# Altium PCB board.PcbDoc (part 1 of 2)
Units mm, origin at the board's own origin, x right, y up, seen from the top; angles counter-clockwise.
Board outline 58 x 79 mm, 2 copper layers (Top Layer, Bottom Layer), stack 0.97 mm thick; 224 components, 193 nets, 673 pads, 83 vias.
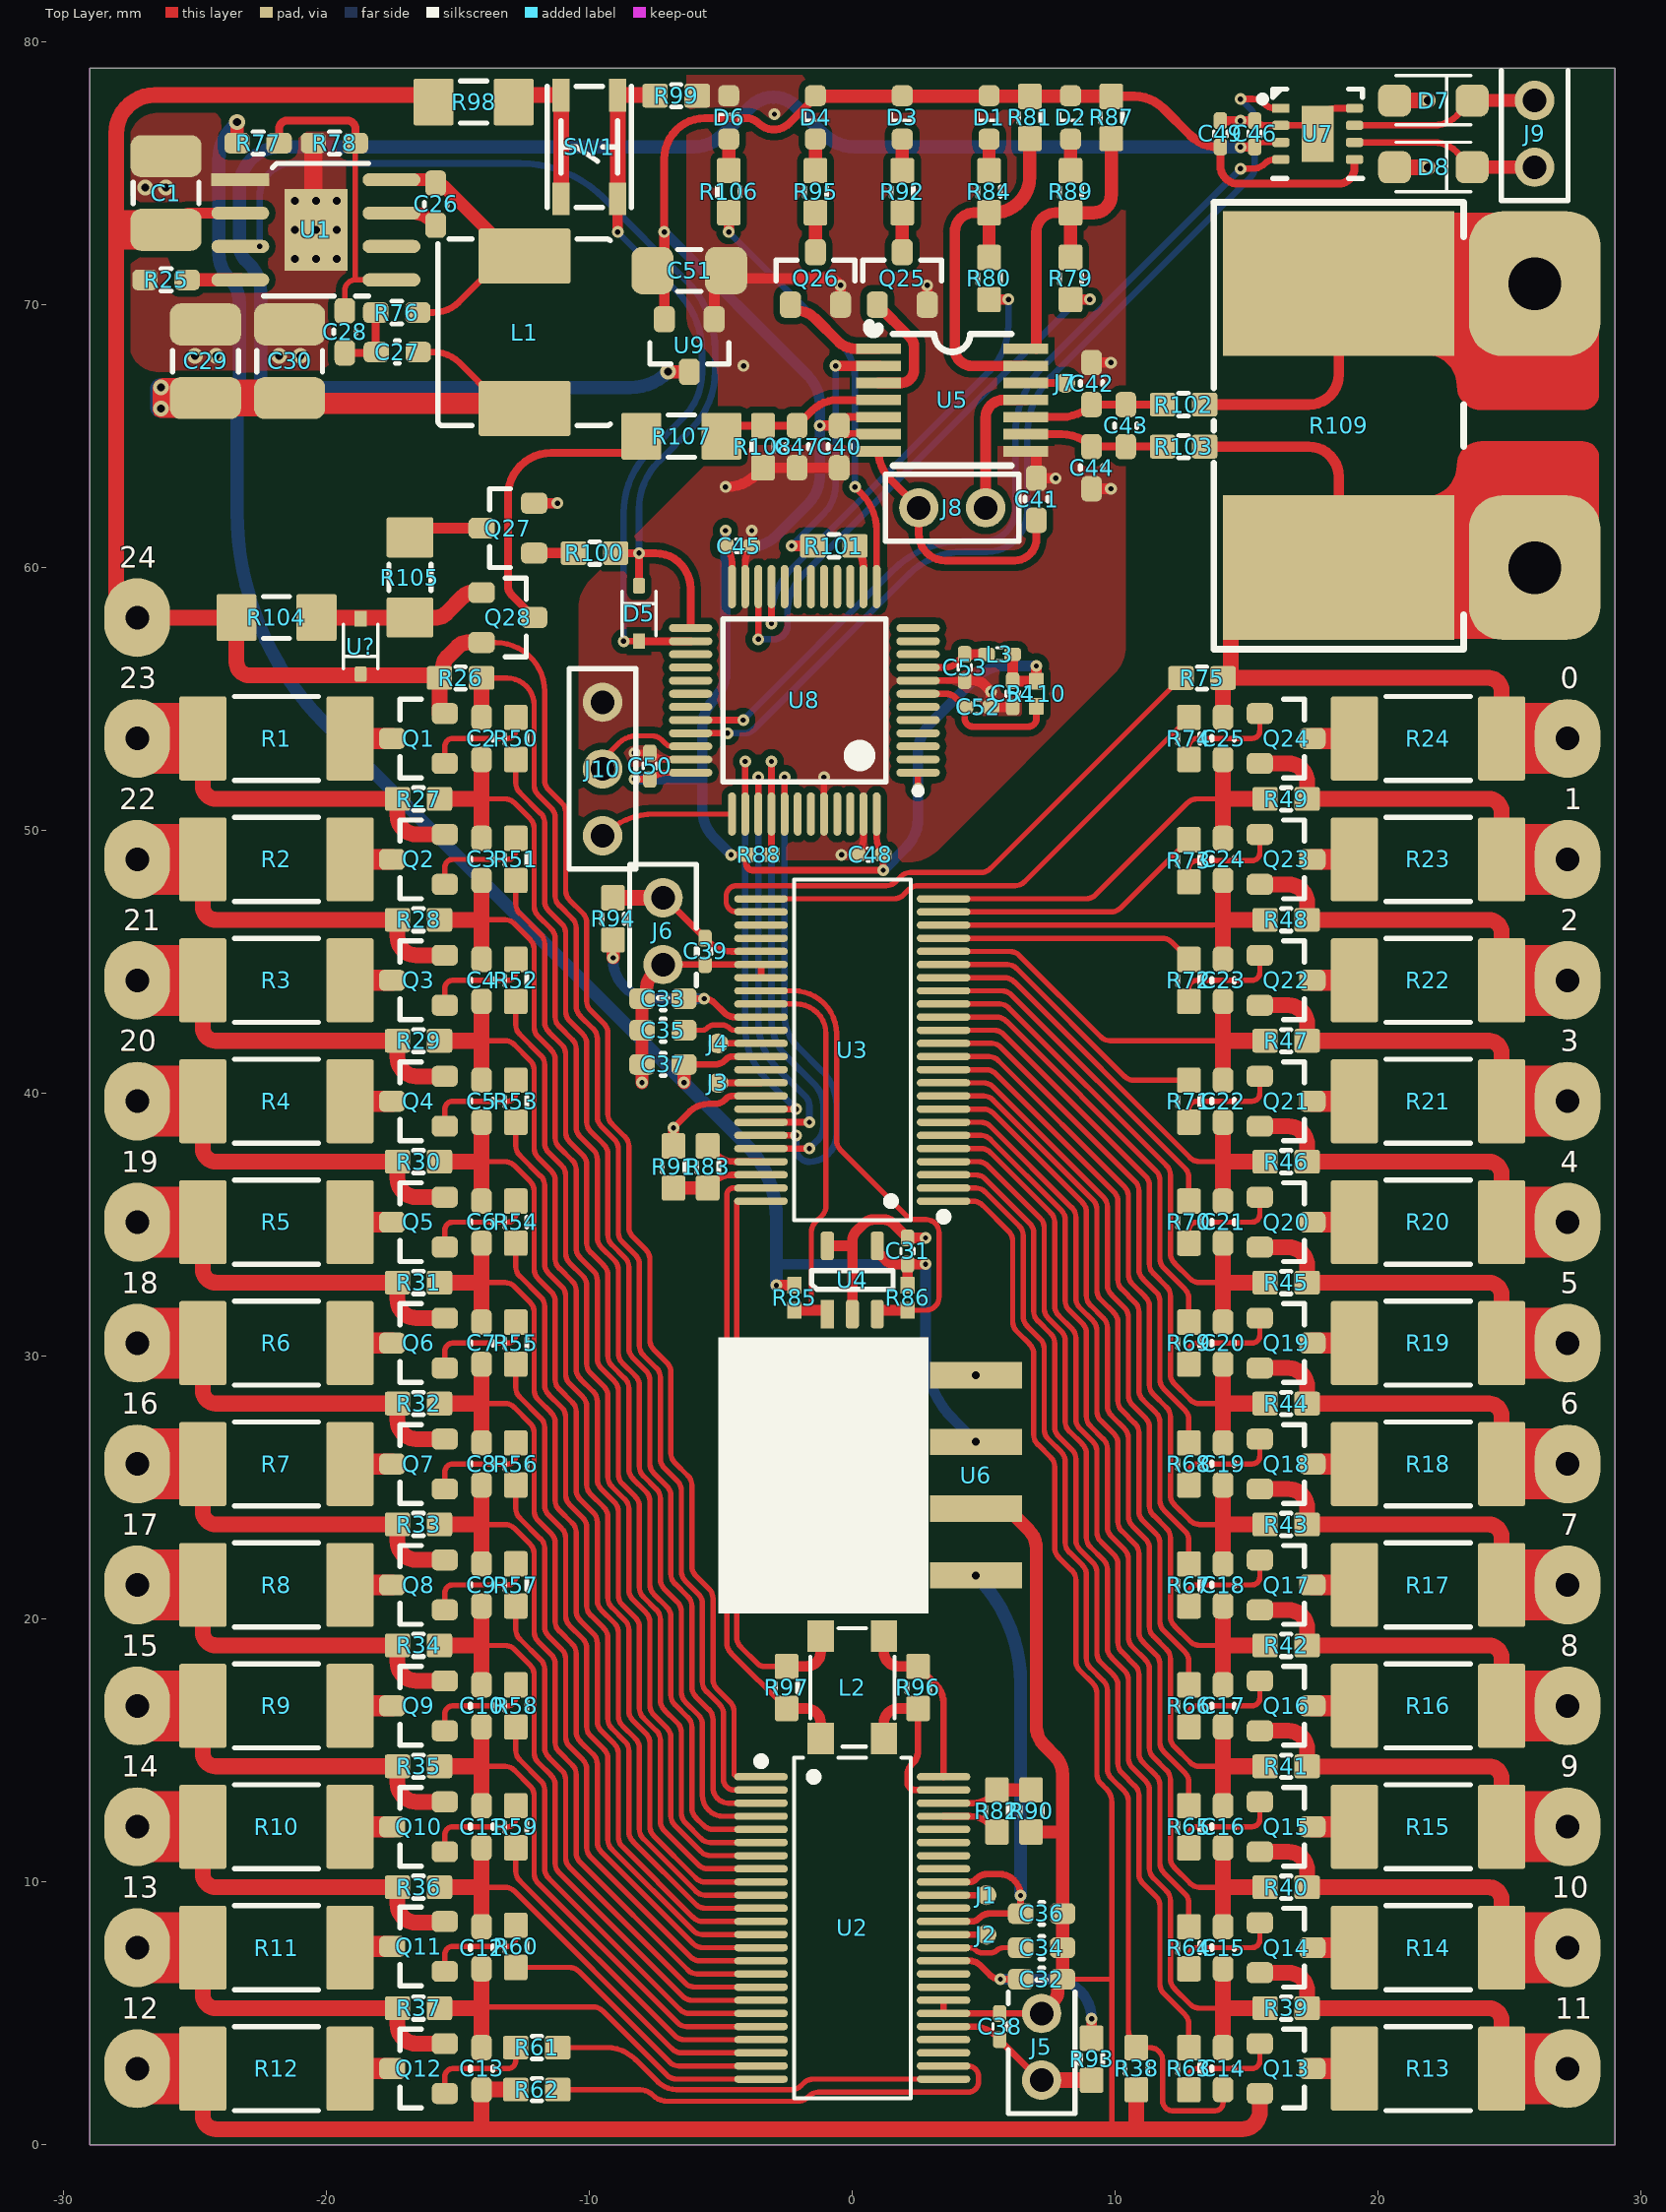
[diagram p0: Top Layer view]
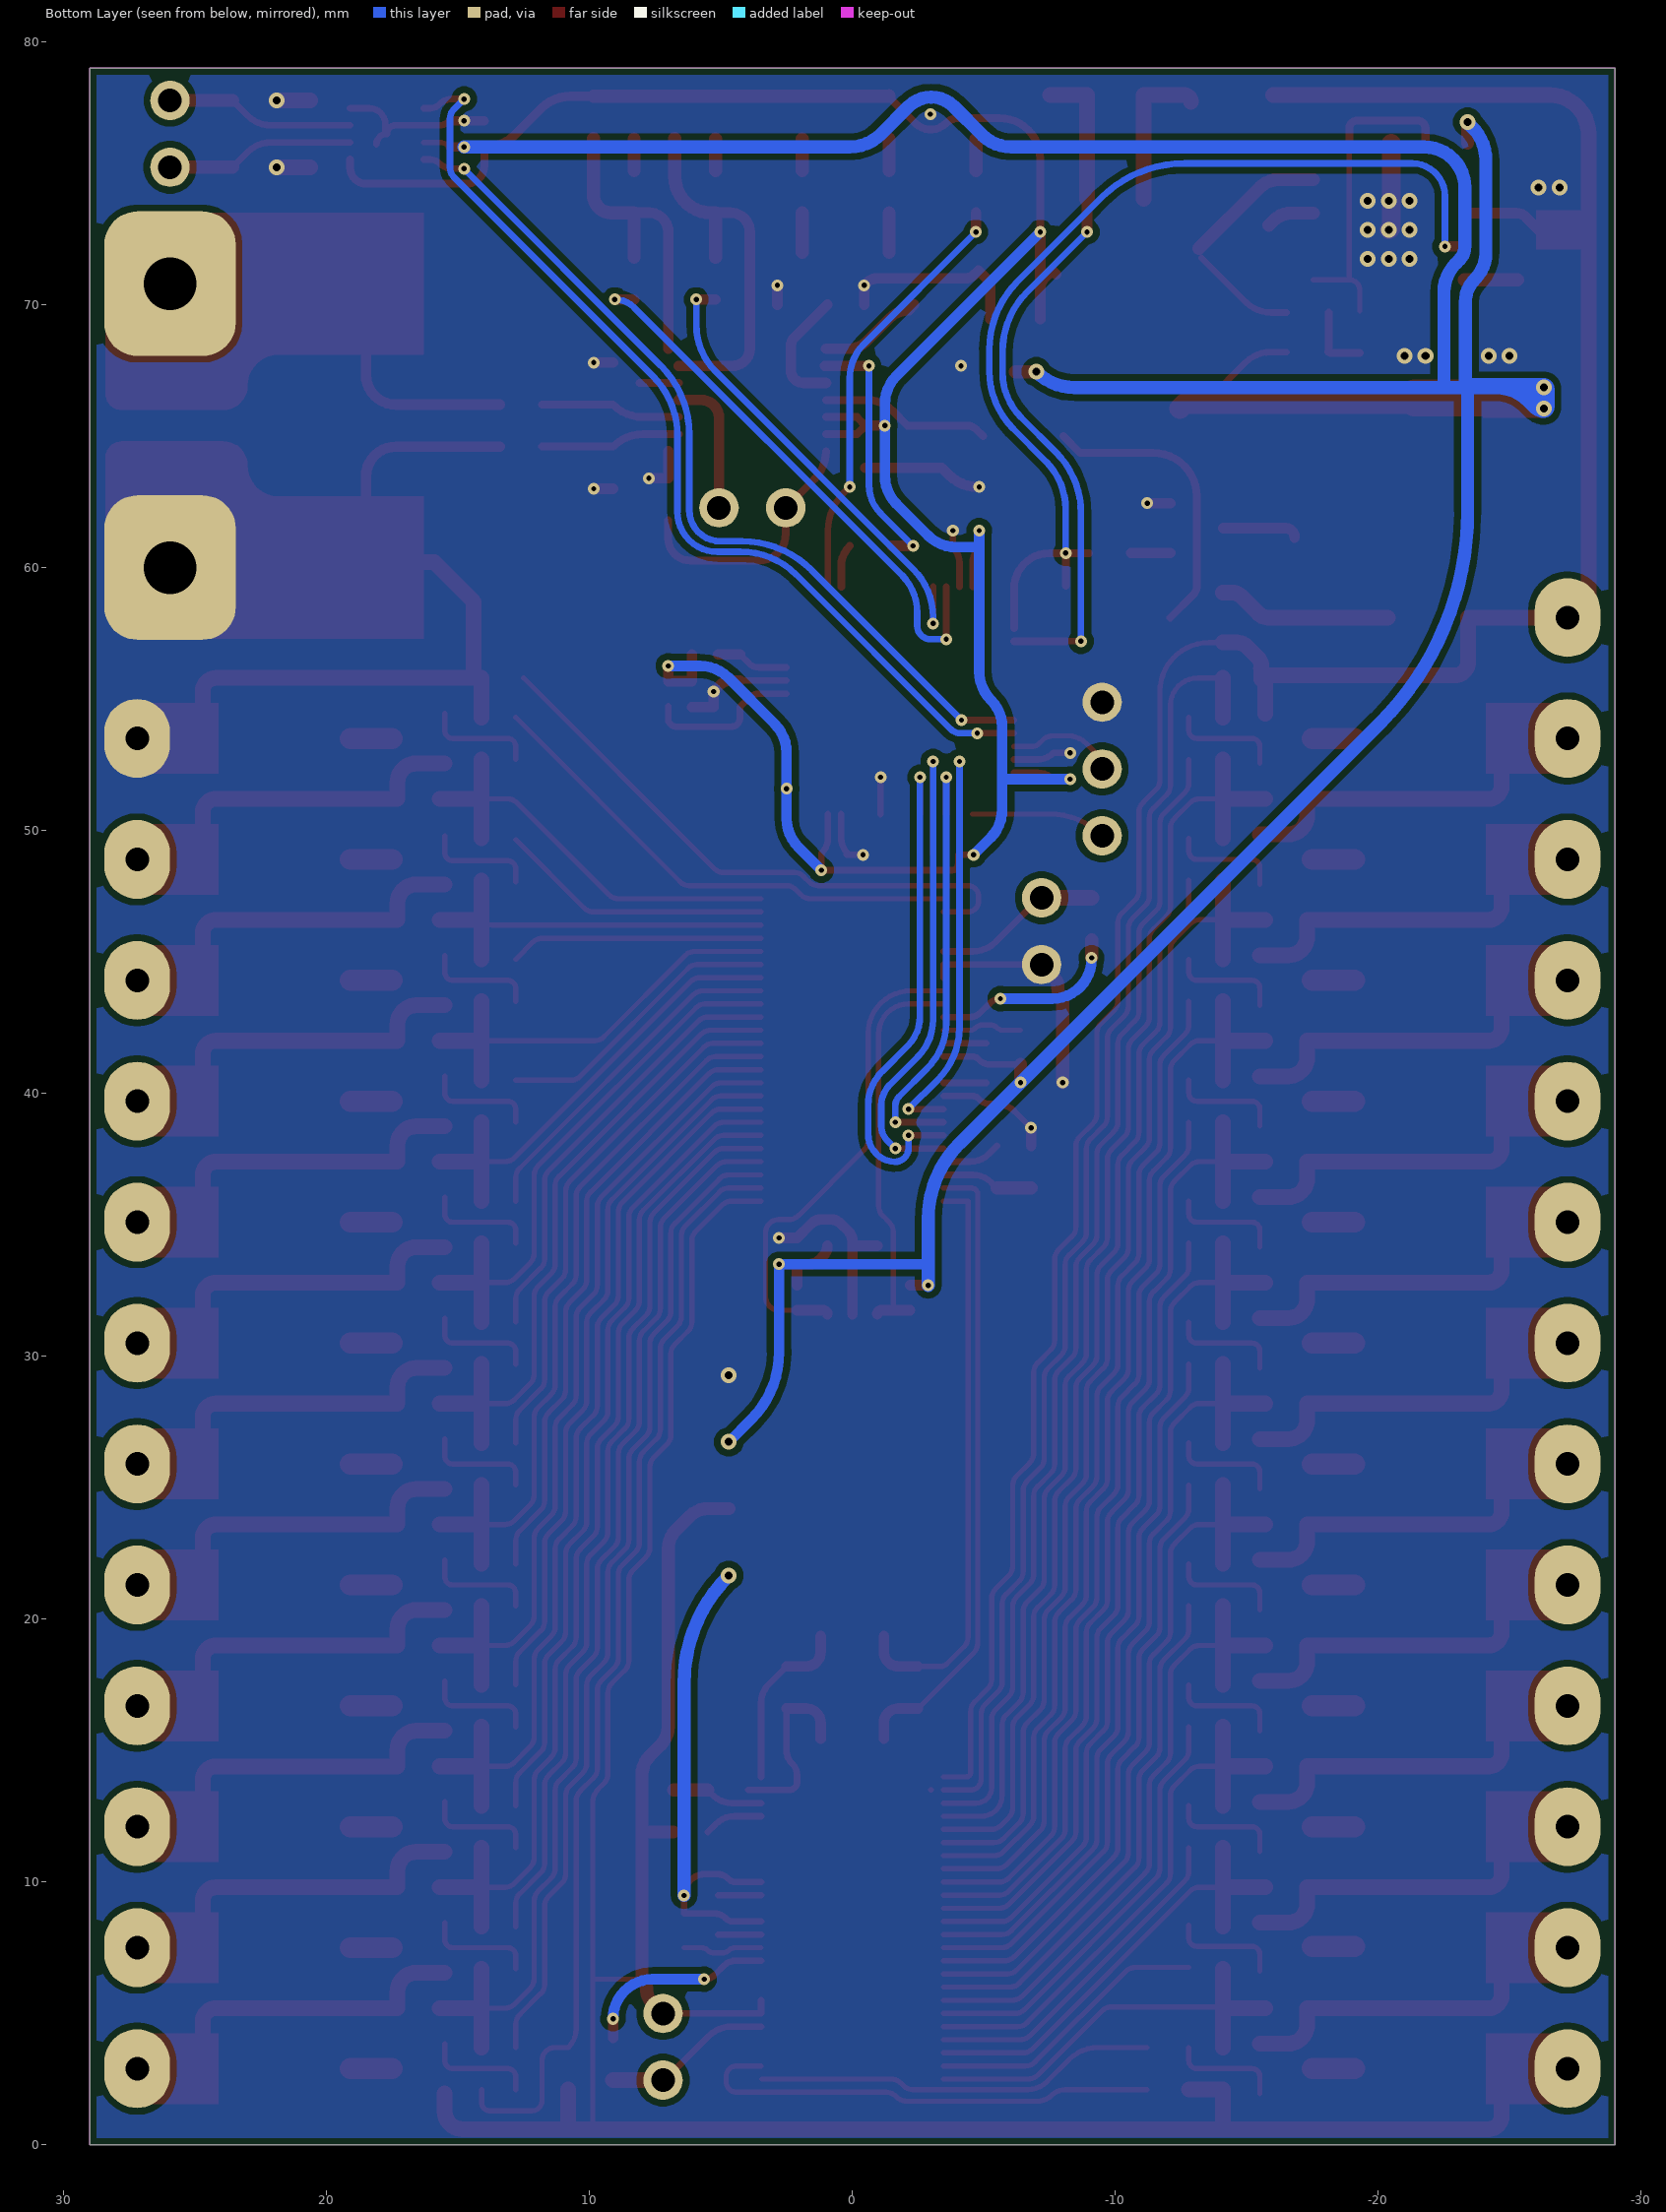
[diagram p1: Bottom Layer view, seen from below]
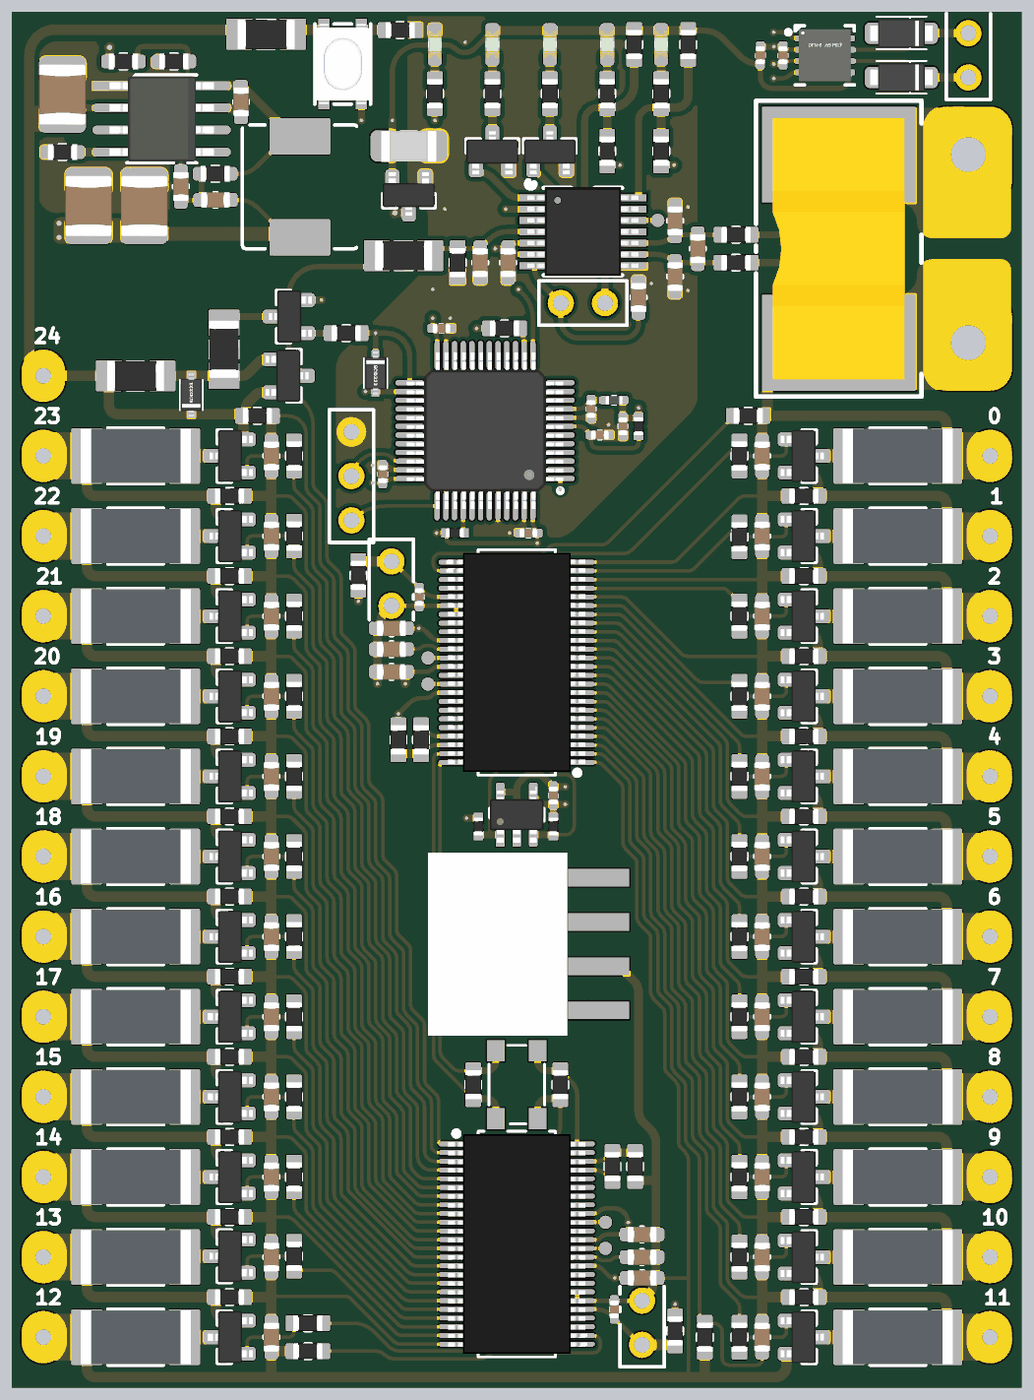
[diagram p3: 3D render of the assembled board from above, using the file's embedded part models]

## Layer stack, top to bottom
Top Solder: solder mask 0.0127, Solder Resist, Dk 3.8
Top Layer: signal copper 0.035
Dielectric: core 0.9, FR-4, Dk 4.5
Bottom Layer: signal copper 0.035
Bottom Solder: solder mask 0.0127, Solder Resist, Dk 3.8

## Board outline
-29,0 29,0 29,79 -29,79

## Design rules (kind name [scope] priority, off if disabled: settings)
AcuteAngle [All] p1: minimum=6.00000000000000E+0001 checktracksonly=FALSE
Clearance Clearance_1 [All] p1: gap=0.25 ignorepadtopadclearanceinfootprint=FALSE except(0.13: Arc-Arc Arc-Track Arc-SMDPad Arc-Via Track-Track Track-SMDPad Track-Via SMDPad-SMDPad SMDPad-Via THPad-Via Via-Via; 0.15: Arc-THPad Arc-Text Arc-Hole Track-THPad Track-Text Track-Hole SMDPad-THPad SMDPad-Text SMDPad-Hole THPad-THPad THPad-Text THPad-Hole Via-Text Via-Hole Fill-Text Fill-Hole Poly-Text Poly-Hole Region-Text Region-Hole Text-Text Text-Hole)
ComponentClearance ComponentClearance_1 [HasFootprint('HDR-1X2')] p1: gap=-1 collisioncheckmode=3 verticalgap=2540 showdistances=FALSE
ComponentClearance ComponentClearance_3 [HasFootprint('TP30_SMD')] p2: gap=-1 collisioncheckmode=3 verticalgap=2540 showdistances=FALSE
ComponentClearance ComponentClearance_4 [HasFootprint('HDR-1X3')] p3: gap=-1 collisioncheckmode=3 verticalgap=2540 showdistances=FALSE
ComponentClearance ComponentClearance_2 [HasFootprint('CONN_DG308-2.54-2P') vs HasFootprint('CONN_DG308-2.54-2P')] p4: gap=-1 collisioncheckmode=3 verticalgap=2540 showdistances=FALSE
ComponentClearance [All] p5: gap=0.3 collisioncheckmode=3 verticalgap=0.254 showdistances=FALSE
HoleSize [All] p1: absolutevalues=TRUE maxlimit=6 minlimit=0.2 maxpercent=80.000 minpercent=20.000
HoleToHoleClearance HoleToHoleClearance_1 [IsVia vs IsThruPin] p1: gap=0.7 allowstackedmicrovias=TRUE
HoleToHoleClearance [All] p2: gap=0.5 allowstackedmicrovias=TRUE
MinimumSolderMaskSliver [All] p1 off: minsoldermaskwidth=0.254
PlaneClearance [All] p1: clearance=0.45
PlaneConnect [All] p1: planeconnectstyle=Direct reliefexpansion=0.3 reliefentries=4 reliefconductorwidth=0.381 reliefairgap=0.178
PolygonConnect [All] p1: connectstyle=Direct reliefconductorwidth=0.381 reliefentries=4 polygonreliefangle="90 Angle" airgapwidth=0.356
RoutingVias [All] p1: holewidth=0.3 width=0.6 viastyle="Through Hole" minholewidth=0.2 minwidth=0.45 maxholewidth=0.9 maxwidth=1.27
SilkToSilkClearance [All] p1 off: silktosilkclearance=0.254
SilkToSolderMaskClearance [IsPad] p1 off: minsilkscreentomaskgap=0.254 clearancetoexposedcopper=TRUE
SolderMaskExpansion [All] p1: expansion=0.102 istentingtop=FALSE
UnRoutedNet [All] p1: checkbadconnections=TRUE
Width [All] p1: maxlimit=3.81 minlimit=0.14 preferedwidth=0.254
21 further rules are at their usual default settings.

## Components (designator, comment, footprint, x,y, rotation, side; value= is the part's Value field where it differs from the comment)
C1 "2u2" C1210 -26.1,74.25 r270 top
C2 "10nF" C0603 -14.1,53.5 r90 top
C3 "10nF" C0603 -14.1,48.9 r90 top
C4 "10nF" C0603 -14.1,44.3 r90 top
C5 "10nF" C0603 -14.1,39.7 r90 top
C6 "10nF" C0603 -14.1,35.1 r90 top
C7 "10nF" C0603 -14.1,30.5 r90 top
C8 "10nF" C0603 -14.1,25.9 r90 top
C9 "10nF" C0603 -14.1,21.3 r90 top
C10 "10nF" C0603 -14.1,16.7 r90 top
C11 "10nF" C0603 -14.1,12.1 r90 top
C12 "10nF" C0603 -14.1,7.5 r90 top
C13 "10nF" C0603 -14.1,2.9 r90 top
C14 "10nF" C0603 14.1,2.9 r270 top
C15 "10nF" C0603 14.1,7.5 r270 top
C16 "10nF" C0603 14.1,12.1 r270 top
C17 "10nF" C0603 14.1,16.7 r270 top
C18 "10nF" C0603 14.1,21.3 r270 top
C19 "10nF" C0603 14.1,25.9 r270 top
C20 "10nF" C0603 14.1,30.5 r270 top
C21 "10nF" C0603 14.1,35.1 r270 top
C22 "10nF" C0603 14.1,39.7 r270 top
C23 "10nF" C0603 14.1,44.3 r270 top
C24 "10nF" C0603 14.1,48.9 r270 top
C25 "10nF" C0603 14.1,53.5 r270 top
C26 "2.2nF" C0603 -15.844,73.825 r90 top
C27 "22n" C0603 -17.309,68.2 r0 top
C28 "56pF" C0603 -19.3,68.969 r270 top
C29 "22u" C1210 -24.6,67.85 r270 top
C30 "22u" C1210 -21.4,67.85 r270 top
C31 "100nF" C0402 2.1,34 r270 top
C32 "1uF" C0603 7.2,6.3 r180 top
C33 "1uF" C0603 -7.2,43.6 r0 top
C34 "1uF" C0603 7.2,7.5 r180 top
C35 "1uF" C0603 -7.2,42.4 r0 top
C36 "1uF" C0603 7.2,8.8 r180 top
C37 "1uF" C0603 -7.2,41.1 r0 top
C38 "100nF" C0402 5.6,4.5 r270 top
C39 "100nF" C0402 -5.6,45.4 r90 top
C40 "100nF" C0603 -0.5,64.6 r90 top
C41 "1uF" C0603 7,62.6 r270 top
C42 "100nF" C0603 9.1,67 r270 top
C43 "100nF" C0603 10.4,65.4 r90 top
C44 "100nF" C0603 9.1,63.8 r90 top
C45 "100nF" C0402 -4.325,60.825 r180 top
C46 "100nF" C0402 15.3,76.5 r270 top
C47 "3n3" C0603 -2.1,64.6 r270 top
C48 "100nF" C0402 0.675,49.075 r0 top
C49 "100nF" C0402 14,76.5 r270 top
C50 "100nF" C0402 -7.7,52.45 r270 top
C51 "10uF" C1206 -6.2,71.3 r180 top
C52 "100nF" C0402 4.775,54.7 r180 top
C53 "100nF" C0402 4.275,56.2 r90 top
C54 "100nF" C0402 6.099,55.2 r90 top
D1 "GRN" LED-0603-GRN 5.2,77.125 r90 top
D2 "GRN" LED-0603-GRN 8.3,77.125 r90 top
D3 "GRN" LED-0603-GRN 1.9,77.125 r90 top
D4 "GRN" LED-0603-GRN -1.4,77.125 r90 top
D5 "1N4148WS" SOD-323 -8.114,58.255 r270 top
D6 "GRN" LED-0603-GRN -4.7,77.125 r270 top
D7 "24V" SOD-123FL 22.1,77.77 r0 top
D8 "24V" SOD-123FL 22.1,75.23 r0 top
J1 "" TP30_SMD 5.1,9.5 r90 top
J2 "" TP30_SMD 5.1,8 r90 top
J3 "" TP30_SMD -5.1,40.4 r90 top
J4 "" TP30_SMD -5.1,41.9 r90 top
J5 "NTC" HDR-1X2 7.2,3.73 r180 top
J6 "NTC" HDR-1X2 -7.2,46.17 r0 top
J7 "" TP30_SMD 8.1,67.025 r180 top
J8 "NTC" HDR-1X2 3.8,62.275 r90 top
J9 "CAN" HDR-1X2 25.95,76.5 r0 top
J10 "SWD" HDR-1X3 -9.5,52.34 r180 top
L1 "68uH" L0605-POWER -12.46,68.95 r90 top
L2 "DLW43SH101XK2L" FILTER-SMD_4P-L4.5-W3.2-BL 0,17.4 r270 top
L3 "BEAD" L0402 5.599,56.7 r180 top
Q1 "BSS308PE-VB" SOT-23 -16.5,53.5 r0 top
Q2 "BSS308PE-VB" SOT-23 -16.5,48.9 r0 top
Q3 "BSS308PE-VB" SOT-23 -16.5,44.3 r0 top
Q4 "BSS308PE-VB" SOT-23 -16.5,39.7 r0 top
Q5 "BSS308PE-VB" SOT-23 -16.5,35.1 r0 top
Q6 "BSS308PE-VB" SOT-23 -16.5,30.5 r0 top
Q7 "BSS308PE-VB" SOT-23 -16.5,25.9 r0 top
Q8 "BSS308PE-VB" SOT-23 -16.5,21.3 r0 top
Q9 "BSS308PE-VB" SOT-23 -16.5,16.7 r0 top
Q10 "BSS308PE-VB" SOT-23 -16.5,12.1 r0 top
Q11 "BSS308PE-VB" SOT-23 -16.5,7.55 r0 top
Q12 "BSS308PE-VB" SOT-23 -16.5,2.9 r0 top
Q13 "BSS308PE-VB" SOT-23 16.5,2.9 r180 top
Q14 "BSS308PE-VB" SOT-23 16.5,7.5 r180 top
Q15 "BSS308PE-VB" SOT-23 16.5,12.1 r180 top
Q16 "BSS308PE-VB" SOT-23 16.5,16.7 r180 top
Q17 "BSS308PE-VB" SOT-23 16.5,21.3 r180 top
Q18 "BSS308PE-VB" SOT-23 16.5,25.9 r180 top
Q19 "BSS308PE-VB" SOT-23 16.5,30.5 r180 top
Q20 "BSS308PE-VB" SOT-23 16.5,35.1 r180 top
Q21 "BSS308PE-VB" SOT-23 16.5,39.7 r180 top
Q22 "BSS308PE-VB" SOT-23 16.5,44.3 r180 top
Q23 "BSS308PE-VB" SOT-23 16.5,48.9 r180 top
Q24 "BSS308PE-VB" SOT-23 16.5,53.5 r180 top
Q25 "2N7002" SOT-23 1.9,71 r270 top
Q26 "2N7002" SOT-23 -1.4,71 r270 top
Q27 "BSS123" SOT-23 -13.1,61.5 r0 top
Q28 "PJM10H01PSA" SOT-23 -13.1,58.1 r180 top
R1 "33" R2512 -21.9,53.5 r180 top
R2 "33" R2512 -21.9,48.9 r180 top
R3 "33" R2512 -21.9,44.3 r180 top
R4 "33" R2512 -21.9,39.7 r180 top
R5 "33" R2512 -21.9,35.1 r180 top
R6 "33" R2512 -21.9,30.5 r180 top
R7 "33" R2512 -21.9,25.9 r180 top
R8 "33" R2512 -21.9,21.3 r180 top
R9 "33" R2512 -21.9,16.7 r180 top
R10 "33" R2512 -21.9,12.1 r180 top
R11 "33" R2512 -21.9,7.5 r180 top
R12 "33" R2512 -21.9,2.9 r180 top
R13 "33" R2512 21.9,2.9 r0 top
R14 "33" R2512 21.9,7.5 r0 top
R15 "33" R2512 21.9,12.1 r0 top
R16 "33" R2512 21.9,16.7 r0 top
R17 "33" R2512 21.9,21.3 r0 top
R18 "33" R2512 21.9,25.9 r0 top
R19 "33" R2512 21.9,30.5 r0 top
R20 "33" R2512 21.9,35.1 r0 top
R21 "33" R2512 21.9,39.7 r0 top
R22 "33" R2512 21.9,44.3 r0 top
R23 "33" R2512 21.9,48.9 r0 top
R24 "33" R2512 21.9,53.5 r0 top
R25 "100k" R0603#1 -26.1,70.945 r180 top
R26 "100" R0603#2 -14.9,55.8 r0 top
R27 "100" R0603#2 -16.5,51.2 r0 top
R28 "100" R0603#2 -16.5,46.6 r0 top
R29 "100" R0603#2 -16.5,42 r0 top
R30 "100" R0603#2 -16.5,37.4 r0 top
R31 "100" R0603#2 -16.5,32.8 r0 top
R32 "100" R0603#2 -16.5,28.2 r0 top
R33 "100" R0603#2 -16.5,23.6 r0 top
R34 "100" R0603#2 -16.5,19 r0 top
R35 "100" R0603#2 -16.5,14.4 r0 top
R36 "100" R0603#2 -16.5,9.8 r0 top
R37 "100" R0603#2 -16.5,5.2 r0 top
R38 "100" R0603#2 10.8,2.9 r90 top
R39 "100" R0603#2 16.5,5.2 r180 top
R40 "100" R0603#2 16.5,9.8 r180 top
R41 "100" R0603#2 16.5,14.4 r180 top
R42 "100" R0603#2 16.5,19 r180 top
R43 "100" R0603#2 16.5,23.6 r180 top
R44 "100" R0603#2 16.5,28.2 r180 top
R45 "100" R0603#2 16.5,32.8 r180 top
R46 "100" R0603#2 16.5,37.4 r180 top
R47 "100" R0603#2 16.5,42 r180 top
R48 "100" R0603#2 16.5,46.6 r180 top
R49 "100" R0603#2 16.5,51.2 r180 top
R50 "3k3" R0603#2 -12.8,53.5 r270 top
R51 "3k3" R0603#2 -12.8,48.9 r270 top
R52 "3k3" R0603#2 -12.8,44.3 r270 top
R53 "3k3" R0603#2 -12.8,39.7 r270 top
R54 "3k3" R0603#2 -12.8,35.1 r270 top
R55 "3k3" R0603#2 -12.8,30.5 r270 top
R56 "3k3" R0603#2 -12.8,25.9 r270 top
R57 "3k3" R0603#2 -12.8,21.3 r270 top
R58 "3k3" R0603#2 -12.8,16.7 r270 top
R59 "3k3" R0603#2 -12.8,12.1 r270 top
R60 "3k3" R0603#2 -12.8,7.55 r270 top
R61 "3k3" R0603#2 -12,3.7 r0 top
R62 "100" R0603#2 -12,2.1 r0 top
R63 "3k3" R0603#2 12.8,2.9 r90 top
R64 "3k3" R0603#2 12.8,7.5 r90 top
R65 "3k3" R0603#2 12.8,12.1 r90 top
R66 "3k3" R0603#2 12.8,16.7 r90 top
R67 "3k3" R0603#2 12.8,21.3 r90 top
R68 "3k3" R0603#2 12.8,25.9 r90 top
R69 "3k3" R0603#2 12.8,30.5 r90 top
R70 "3k3" R0603#2 12.8,35.1 r90 top
R71 "3k3" R0603#2 12.8,39.7 r90 top
R72 "3k3" R0603#2 12.8,44.3 r90 top
R73 "3k3" R0603#2 12.8,48.85 r90 top
R74 "3k3" R0603#2 12.8,53.5 r90 top
R75 "100" R0603#2 13.3,55.8 r180 top
R76 "237k" R0603#1 -17.325,69.7 r180 top
R77 "18k" R0603#1 -22.6,76.15 r0 top
R78 "101k" R0603#1 -19.7,76.15 r180 top
R79 "100" R0603#2 8.3,71 r270 top
R80 "100" R0603#2 5.2,71 r270 top
R81 "2k2" R0603#2 6.75,77.125 r90 top
R82 "3k" R0603#2 5.5,12.7 r270 top
R83 "3k" R0603#2 -5.5,37.2 r90 top
R84 "470" R0603#2 5.2,74.3 r90 top
R85 "22k" R0402 -2.2,32.224 r90 top
R86 "22k" R0402 2.1,32.224 r90 top
R87 "2k2" R0603#2 9.85,77.125 r90 top
R88 "4k7" R0402 -3.551,49.075 r0 top
R89 "470" R0603#2 8.3,74.3 r90 top
R90 "1k5" R0603#2 6.8,12.7 r90 top
R91 "1k5" R0603#2 -6.8,37.2 r270 top
R92 "470" R0603#2 1.9,74.3 r90 top
R93 "4k7" R0603#2 9.1,3.26 r270 top
R94 "4k7" R0603#2 -9.1,46.64 r90 top
R95 "470" R0603#2 -1.4,74.3 r90 top
R96 "100" R0603#2 2.5,17.4 r270 top
R97 "100" R0603#2 -2.5,17.4 r270 top
R98 "470k" R1206 -14.4,77.711 r0 top
R99 "18k" R0603#2 -6.7,77.95 r180 top
R100 "100" R0603#2 -9.8,60.55 r0 top
R101 "100" R0603#2 -0.7,60.825 r180 top
R102 "100" R0603#2 12.6,66.2 r180 top
R103 "100" R0603#2 12.6,64.6 r180 top
R104 "1M" R1206 -21.9,58.1 r180 top
R105 "100k" R1206 -16.824,59.624 r270 top
R106 "" R0603#2 -4.7,74.3 r270 top
R107 "470k" R1206 -6.5,65 r180 top
R108 "18k" R0603#2 -3.4,64.6 r90 top
R109 "1mR" R5930_SHUNT 18.5,65.4 r90 top
R110 "4k7" R0402 7,55.2 r270 top
SW1 "PTS810SJS250" BTN_PTS810 -10,76 r270 top
U1 "LM5164" PowerSOIC-8 -20.4,72.85 r270 top
U2 "LTC6811HG-1#3ZZTRPBF" SSOP-48_L12.8-W5.3-P0.50-LS7.8-BL 0,8.25 r270 top
U3 "LTC6811HG-1#3ZZTRPBF" SSOP-48_L12.8-W5.3-P0.50-LS7.8-BL 0,41.65 r90 top
U4 "ZD24C08A-STGMT" SOT-23-5 0,32.9 r270 top
U5 "BQ34Z100PWR-G1" TSSOP-14_L5.0-W4.4-P0.65-LS6.4-BL 3.8,66.375 r270 top
U6 "B0505S-1WS" B0505S-1WS 4.7,25.47 r90 top
U7 "SIT1042QTK/3" DFN8_3X3_P065 17.7,76.5 r0 top
U8 "STM32F103CBT6" LQFP-48 -1.825,54.95 r180 top
U9 "XC6206P332MR" SOT-23 -6.2,68.45 r90 top
U? "15V" SOD-323 -18.7,57 r90 top

## Footprints (in the part's own frame and the unit in brackets; to place one, negate y for a bottom-side part, rotate by r counter-clockwise, add the part's x,y. Pads: shape width x height; smd on the part's side, far side on the other; paste and mask are expansions set on the pad)
B0505S-1WS [mm]
  rect 1x3.5 smd: 1(3.81,0) 2(1.27,0) 3(-1.27,0) 4(-3.81,0)
  silkscreen extent -5.25,1.8 5.25,9.8, body extent -5.08,1.8 5.08,9.42, height 5.2
BTN_PTS810 [mm]
  rect 1.25x0.65 smd mask+0.05: 1(-1.975,1.075) 2(1.975,1.075) 3(-1.975,-1.075) 4(1.975,-1.075)
  silkscreen extent -2.3,-1.6 2.3,1.6, body extent -2.3,-1.6 2.3,1.6, height 2.5
C0402 [mm] "Chip Capacitor Body"
  rrect50% 0.635x0.508 smd mask+0.05: 1(-0.5,0) 2(0.5,0)
  silkscreen extent -0.1,-0.25 0.1,0.25, body extent -0.52,-0.27 0.53,0.28, height 0.55
C0603 [mil] "Chip Capacitor"
  rrect50% 38x31 smd mask+1.97: 1(-31.5,0) 2(31.5,0)
  silkscreen extent -3,-17 3,17, body extent -33,-18 33,18, height 35
C1206 [mm] "Chip Capacitor"
  rrect50% 1.6x1.8 smd: 1(-1.4,0) 2(1.4,0)
  silkscreen extent -0.45,-0.8 0.45,0.8, body extent -1.6,-0.88 1.6,0.92, height 1.6
C1210 [mm] "Chip Capacitor"
  rrect50% 1.6x2.7 smd mask+0.05: 1(-1.4,0) 2(1.4,0)
  silkscreen extent -0.4,-1.25 0.4,1.25, body extent -1.75,-1.35 1.75,1.35, height 1.8
DFN8_3X3_P065 [mm]
  rect 0.65x0.35 smd mask+0.05: 1(-1.4,0.975)
  rrect50% 0.65x0.35 smd mask+0.05: 2(-1.4,0.325) 3(-1.4,-0.325) 4(-1.4,-0.975) 5(1.4,-0.975) 6(1.4,-0.325) 7(1.4,0.325) 8(1.4,0.975)
  rect 1.2x2.15 smd mask+0.05: 9(0,0)
  silkscreen extent -2.22,-1.7 1.7,1.7, body extent -1.51,-1.5 1.51,1.5, height 0.8
FILTER-SMD_4P-L4.5-W3.2-BL [mm]
  rect 1.2x1 smd: 1(-1.95,-1.2) 2(1.95,-1.2) 3(1.95,1.2) 4(-1.95,1.2)
  silkscreen extent -2.25,-1.6 2.25,1.6, body extent -2.25,-1.53 2.25,1.67, height 2.6
HDR-1X2 [mm]
  round 1.5 hole 0.9: 1(0,1.27) 2(0,-1.27)
  silkscreen extent -1.27,-2.54 1.27,2.54
HDR-1X3 [mm]
  round 1.5 hole 0.9: 1(0,2.54) 2(0,0) 3(0,-2.54)
  silkscreen extent -1.27,-3.81 1.27,3.81
L0402 [mm] "Chip Inductor"
  rrect50% 0.635x0.508 smd mask+0.05: 1(-0.5,0) 2(0.5,0)
  silkscreen extent -0.1,-0.25 0.1,0.25, body extent -0.5,-0.25 0.5,0.25, height 0.5
L0605-POWER [mm]
  rrect10% 2.1x3.5 smd paste+0 mask+0.05: 1(2.9,0) 2(-2.9,0)
  Top Layer pour cut-out: -1.9,-3.122 -1.886,-3.19 -1.848,-3.248 -1.79,-3.286 -1.722,-3.3 -1.722,-3.3 1.722,-3.3 1.79,-3.286 1.848,-3.248 1.886,-3.19 1.9,-3.122 1.9,-3.122 1.9,3.122 1.886,3.19 1.848,3.248 1.79,3.286 1.722,3.3 1.722,3.3 -1.722,3.3 -1.79,3.286 -1.848,3.248 -1.886,3.19 -1.9,3.122 -1.9,3.122
  silkscreen extent -3.55,-3.26 3.55,3.3, body extent -3.55,-3.3 3.55,3.3, height 5
LED-0603-GRN [mm]
  rrect50% 0.8x0.8 smd mask+0.05: 1(0.825,0) 2(-0.825,0)
  silkscreen extent -0.18,-0.4 0.2,0.4, body extent -0.8,-0.4 0.8,0.4, height 0.6
LQFP-48 [mm]
  oval 1.65x0.3 smd: 1(-4.325,2.75) 2(-4.325,2.25) 3(-4.325,1.75) 4(-4.325,1.25) 5(-4.325,0.75) 6(-4.325,0.25) 7(-4.325,-0.25) 8(-4.325,-0.75) 9(-4.325,-1.25) 10(-4.325,-1.75) 11(-4.325,-2.25) 12(-4.325,-2.75) 25(4.325,-2.75) 26(4.325,-2.25) 27(4.325,-1.75) 28(4.325,-1.25) 29(4.325,-0.75) 30(4.325,-0.25) 31(4.325,0.25) 32(4.325,0.75) 33(4.325,1.25) 34(4.325,1.75) 35(4.325,2.25) 36(4.325,2.75)
  oval 0.3x1.65 smd: 13(-2.75,-4.325) 14(-2.25,-4.325) 15(-1.75,-4.325) 16(-1.25,-4.325) 17(-0.75,-4.325) 18(-0.25,-4.325) 19(0.25,-4.325) 20(0.75,-4.325) 21(1.25,-4.325) 22(1.75,-4.325) 23(2.25,-4.325) 24(2.75,-4.325) 37(2.75,4.325) 38(2.25,4.325) 39(1.75,4.325) 40(1.25,4.325) 41(0.75,4.325) 42(0.25,4.325) 43(-0.25,4.325) 44(-0.75,4.325) 45(-1.25,4.325) 46(-1.75,4.325) 47(-2.25,4.325) 48(-2.75,4.325)
  silkscreen extent -4.45,-3.1 3.1,3.57, body extent -4.5,-4.5 4.5,4.5, height 1.5
PowerSOIC-8 [mm]
  rect 0.5x2.2 smd mask+0.05: 1(-1.905,-2.875)
  oval 0.5x2.2 smd mask+0.05: 2(-0.635,-2.875) 3(0.635,-2.875) 4(1.905,-2.875) 5(1.905,2.875) 6(0.635,2.875) 7(-0.635,2.875) 8(-1.905,2.875)
  rect 3.1x2.4 smd mask+0.05: 9(0,0)
  silkscreen extent -2.52,-2 2.52,2, body extent -2.45,-3 2.45,3, height 1.68
R0402 [mm]
  rrect10% 0.635x0.55 smd mask+0.05: 1(-0.476,0) 2(0.476,0)
  body extent -0.52,-0.27 0.53,0.28, height 0.4
R0603#1 [mil] "Chip Resistor; Body 1.6 x 0.8 mm (LxW typ)"
  rrect50% 38x31 smd mask+1.97: 1(-31.5,0) 2(31.5,0)
  silkscreen extent -8,-17 8,17, body extent -33,-18 33,18, height 22
R0603#2 [mil] "Chip Resistor; Body 1.6 x 0.8 mm (LxW typ)"
  rrect20% 38x35.43 smd mask+1.97: 1(-31.5,0) 2(31.5,0)
  silkscreen extent -7,-17 7,17, body extent -33,-18 33,18, height 22
R1206 [mil] "Chip Resistor"
  rrect10% 60x70 smd mask+1.97: 1(-60,0) 2(60,0)
  silkscreen extent -20,-31 20,31, body extent -65,-33 65,33, height 26
R2512 [mm] "Chip Resistor; Body 6.4 x 3.2 mm (LxW typ)"
  rrect10% 1.8x3.2 smd mask+0.05: 1(-2.8,0) 2(2.8,0)
  silkscreen extent -1.6,-1.6 1.6,1.6, body extent -3.19,-1.55 3.16,1.55, height 0.55
R5930_SHUNT [mm]
  rect 5.5x8.8 smd: 1(-5.4,0) 2(5.4,0)
  silkscreen extent -8.5,-4.75 8.5,4.75, body extent -7.5,-3.8 7.5,3.8, height 0.9
SOD-123FL [mm]
  rrect50% 1.25x1.22 smd: 1(-1.475,0) 2(1.475,0)
  silkscreen extent -1.43,-0.92 1.43,0.95, body extent -1.8,-0.83 1.8,0.82, height 0.95
SOD-323 [mm]
  rect 0.59x0.45 smd mask+0.05: 1(1.055,0)
  rrect30% 0.59x0.45 smd mask+0.05: 2(-1.055,0)
  silkscreen extent -0.85,-0.65 0.85,0.65, body extent -1.25,-0.63 1.25,0.62, height 0.99
SOT-23 [mm]
  rrect50% 1x0.8 smd mask+0.05: 1(1,-0.95) 2(1,0.95) 3(-1,0)
  silkscreen extent -0.7,-1.5 0.1,1.5, body extent -1.27,-1.5 1.33,1.5, height 1.1
SOT-23-5 [mm]
  rect 1.1x0.5 smd mask+0.05: 1(1.3,-0.95)
  rrect50% 1.1x0.5 smd mask+0.05: 2(1.3,0) 3(1.3,0.95) 4(-1.3,0.95) 5(-1.3,-0.95)
  silkscreen extent -0.35,-1.55 0.35,1.55, body extent -1.6,-1.55 1.6,1.55, height 1.45
SSOP-48_L12.8-W5.3-P0.50-LS7.8-BL [mm]
  oval 0.28x2.04 smd: 1(-5.75,-3.47) 2(-5.25,-3.47) 3(-4.75,-3.47) 4(-4.25,-3.47) 5(-3.75,-3.47) 6(-3.25,-3.47) 7(-2.75,-3.47) 8(-2.25,-3.47) 9(-1.75,-3.47) 10(-1.25,-3.47) 11(-0.75,-3.47) 12(-0.25,-3.47) 13(0.25,-3.47) 14(0.75,-3.47) 15(1.25,-3.47) 16(1.75,-3.47) 17(2.25,-3.47) 18(2.75,-3.47) 19(3.25,-3.47) 20(3.75,-3.47) 21(4.25,-3.47) 22(4.75,-3.47) 23(5.25,-3.47) 24(5.75,-3.47) 25(5.75,3.47) 26(5.25,3.47) 27(4.75,3.47) 28(4.25,3.47) 29(3.75,3.47) 30(3.25,3.47) 31(2.75,3.47) 32(2.25,3.47) 33(1.75,3.47) 34(1.25,3.47) 35(0.75,3.47) 36(0.25,3.47) 37(-0.25,3.47) 38(-0.75,3.47) 39(-1.25,3.47) 40(-1.75,3.47) 41(-2.25,3.47) 42(-2.75,3.47) 43(-3.25,3.47) 44(-3.75,3.47) 45(-4.25,3.47) 46(-4.75,3.47) 47(-5.25,3.47) 48(-5.75,3.47)
  silkscreen extent -6.49,-3.62 6.48,2.22, body extent -6.3,-3.95 6.3,4.05, height 1.1
TP30_SMD [mil] "TP30_SMD"
  round 30 smd mask+1.97: 1(0,0)
TSSOP-14_L5.0-W4.4-P0.65-LS6.4-BL [mm]
  rect 0.4x1.7 smd: 1(-1.95,-2.8) 2(-1.3,-2.8) 3(-0.65,-2.8) 4(0,-2.8) 5(0.65,-2.8) 6(1.3,-2.8) 7(1.95,-2.8) 8(1.95,2.8) 9(1.3,2.8) 10(0.65,2.8) 11(0,2.8) 12(-0.65,2.8) 13(-1.3,2.8) 14(-1.95,2.8)
  silkscreen extent -2.89,-3.2 2.5,2.25, body extent -2.55,-3.2 2.55,3.2, height 1.2

## Part data
C1: library part CAP, "2.2uF 100V 1210"
C2 C3 C4 C5 C6 C7 C8 C9 C10 C11 C12 C13 C14 C15 C16 C17 C18 C19 C20 C21 C22 C23 C24 C25: library part CAP, "10nF 50V 0603"
C26: library part CAP, "2.2nF 50V 0603"
C27: library part CAP, "2.2nF 0603"
C28: library part CAP, "56pF 0603"
C29 C30: library part CAP, "22u 35V 1210"
C31 C38 C39 C45 C46 C48 C49 C50 C52 C53 C54: library part CAP, "100nF 50V 0402"
C32 C33 C34 C35 C36 C37 C41: library part CAP, "1uF 0603"
C40 C42 C43 C44: library part CAP, "100nF 50V 0603"
C47: library part CAP, "3n3 100V 0603"
C51: library part CAP, "10uf 50V 1206"
D1 D2 D3 D4 D6: library part LED-0603-GREEN, "LED 0603 GRN"
D5: library part US1M-13-F
D7 D8: library part SMCJ54A, "P6SMB24A"
J1 J2 J3 J4 J7: library part TP_Dup1
J5 J6 J8 J9: library part "Header 2"
J10: library part "Header 3"
L1: library part SRN3015-100M, "PSPMAA0605H-680M-IGF"
L3: library part BLM18AG601SN1D, "BEAD 0402"
Q1 Q2 Q3 Q4 Q5 Q6 Q7 Q8 Q9 Q10 Q11 Q12 Q13 Q14 Q15 Q16 Q17 Q18 Q19 Q20 Q21 Q22 Q23 Q24 Q27 Q28: library part 2N7002
R1 R2 R3 R4 R5 R6 R7 R8 R9 R10 R11 R12 R13 R14 R15 R16 R17 R18 R19 R20 R21 R22 R23 R24: library part RES, "33R 2512"
R25: library part RES, "100k 0603"
R26 R27 R28 R29 R30 R31 R32 R33 R34 R35 R36 R37 R38 R39 R40 R41 R42 R43 R44 R45 R46 R47 R48 R49 R62 R75 R79 R80 R96 R97 R101 R102 R103: library part RES, "100R 0603"
R50 R51 R52 R53 R54 R55 R56 R57 R58 R59 R60 R61 R63 R64 R65 R66 R67 R68 R69 R70 R71 R72 R73 R74: library part RES, "3k3 0603"
R76: library part RES, "237k 0603"
R77: library part RES, "18k 1% 0603"
R78: library part RES, "101k 0603"
R81 R87: library part RES, "2.2k 0603"
R82 R83: library part RES, "3k 0603"
R84 R89 R92 R95: library part RES, "470R 0603"
R85 R86: library part RES, "22k 0402"
R88 R93 R94: library part RES, "4.7k 0603"
R90 R91: library part RES, "1.5k 0603"
R98 R107: library part RES, "470k 1206"
R99 R108: library part RES, "18k 0603"
R100: library part RES, "100R 1% 0603"
R104: library part RES, "1M 1206"
R105: library part RES, "100k 1206"
R106: library part RES
R109: library part RES, "HolRS5930-7W-1mR-1%"
R110: library part RES, "4k7 0402"
SW1: library part Component_1
U6: library part B0505S-1WR3_C512048
U7: library part LTC2875, "IC INTERFACE CAN"
U9: library part Component_4_1
U?: library part NCP51460SN33T1G, "BZT52C15S"

## Free pads (board coordinates)
  oval 2.5x3 hole 0.9: *(-27.2,2.9) *(-27.2,7.5) *(-27.2,12.1) *(-27.2,16.7) *(-27.2,21.3) *(-27.2,25.9) *(-27.2,30.5) *(-27.2,35.1) *(-27.2,39.7) *(-27.2,44.3) *(-27.2,48.9) *(-27.2,53.5) *(-27.2,58.1) *(27.2,2.9) *(27.2,7.5) *(27.2,12.1) *(27.2,16.7) *(27.2,21.3) *(27.2,25.9) *(27.2,30.5) *(27.2,35.1) *(27.2,39.7) *(27.2,44.3) *(27.2,48.9) *(27.2,53.5)
  rrect50% 5x5.5 hole 2: *(25.95,60) *(25.95,70.8)

## Via types
v1: diameter 0.45, hole 0.2, Top Layer to Bottom Layer, tented both sides, 59 vias
v2: diameter 0.6, hole 0.3, Top Layer to Bottom Layer, tented both sides, 24 vias

## Nets (pads, with @x,y where several pads share a name; then routed paths per layer and width w, separated by ;. In a path a pad name is that pad's centre, name@x,y a point inside that pad or via, vN(x,y) a via of type N, cw(c..) or ccw(c..) an arc to the next point about the centre after c; other vN are vias at no path point)
3V3: C40.2 C45.2 C48.2 C49.2 C50.2 C51.2 C54.2 D1.1 D2.1 D3.1 D4.1 L3.1 R81.2 R87.2 R88.1 R110.1 U5.5 U5.6 U7.5 U8.1 U8.24 U8.36 U8.48 U9.2 | length 100.5
  Top Layer w0.25: v1(-8.285,51.95) C50.2@-7.7,51.95 -7.649,51.95 cw(c-7.046,51.346) -7.046,52.2 U8.36@-6.15,52.2 ; v1(-4.825,61.41) C45.2@-4.825,60.825 -4.825,60.775 cw(c-5.429,60.171) -4.575,60.171 U8.24@-4.575,59.275 ; v1(-4.612,49.075) R88.1@-4.027,49.075 -4.027,48.717 ccw(c-3.8,48.717) -3.8,48.49 v1(1.175,48.49) C48.2@1.175,49.075 1.175,49.125 cw(c1.779,49.729) 0.925,49.729 U8.48@0.925,50.625 ; v1(2.5,51.59) U8.1@2.5,52.175
  Top Layer w0.3: v1(-7.15,72.765) -7.15,75.551 cw(c-5.601,75.551) -5.601,77.1 -4.042,77.1 cw(c-4.042,76.421) -3.562,76.901 ccw(c-2.981,77.482) -2.399,76.901 ; -2.399,76.901 D4.1@-1.375,77.925 ; U5.6@1,65.075 -0.175,65.075 C40.2@-0.5,65.4 -0.175,65.725 U5.5@1,65.725 ; C49.2@14,76 14,75.279 ccw(c14.679,75.279) 14.679,74.6 18.487,74.6 ccw(c18.487,75.213) 19.1,75.213 U7.5@19.1,75.525
  Top Layer w0.35: R87.2@9.85,77.925 10.733,77.925 cw(c10.733,76.376) 11.829,77.471 12.846,76.454 ccw(c13.942,77.549) 13.942,76 C49.2@14,76
  Top Layer w0.4: C51.2@-7.751,71.149 C51.2@-7.6,71.3 -7.299,70.999 cw(c-7.658,70.64) C51.2@-7.15,70.64 ; U9.2@-7.15,69.45 C51.2@-7.15,70.64 ; v1(-7.15,72.765) C51.2@-7.15,70.64 ; v1(-1.235,65.4) C40.2@-0.5,65.4 ; L3.1@6.099,56.7 C54.2@6.099,55.7 ccw(c6.123,55.7) 6.123,55.676 R110.1@7,55.676 v1(7,56.261)
  Top Layer w0.5: D4.1@-1.4,77.95 ccw(c-1.375,77.95) -1.375,77.925 R81.2@6.75,77.925 R87.2@9.85,77.925
  Bottom Layer w0.4: v1(-8.285,51.95) -5.7,51.95 ; v1(-7.15,72.765) -1.689,67.304 cw(c-2.784,66.208) -1.235,66.208 v1(-1.235,65.4) -1.235,63.507 cw(c-2.784,63.507) -1.689,62.411 -2.872,61.228 cw(c-3.967,62.324) -3.967,60.775 -4.825,60.775 ; v1(-4.825,61.41) -4.825,60.775 ; v1(-4.612,49.075) -5.246,49.71 cw(c-4.151,50.805) -5.7,50.805 -5.7,51.95 ; v1(1.175,48.49) 2.046,49.362 ccw(c0.951,50.457) 2.5,50.457 v1(2.5,51.59) 2.5,52.958 cw(c4.049,52.958) 2.954,54.054 4.707,55.807 cw(c5.802,54.711) 5.802,56.261 v1(7,56.261) ; -5.7,51.95 -5.7,53.939 cw(c-4.262,53.939) -5.279,54.956 ccw(c-6.374,56.051) -4.825,56.051 -4.825,60.775
5V: C27.2 C29.2 C30.2 C31.2 C37.2 C46.2 L1.2 R77.1 R85.2 R86.2 U3.37 U4.4 U6.2 U7.3 U9.3 | length 163.5
  Top Layer w0.2: C46.2@15.3,76 cw(c15.722,75.578) 15.722,76.175 U7.3@16.3,76.175
  Top Layer w0.25: C27.2@-16.509,68.2 -15.934,68.2 cw(c-15.934,66.788) -14.935,67.786 -13.599,66.45 -13.26,66.111 ccw(c-12.901,66.471) -12.901,65.963 L1.2@-12.867,65.963 ; C37.2@-6.4,41.1 -5.231,41.1 ccw(c-5.231,41.659) -4.836,41.264 -4.8,41.3 cw(c-4.559,41.059) -4.559,41.4 U3.37@-3.47,41.4
  Top Layer w0.35: v1(14.765,76) C46.2@15.3,76
  Top Layer w0.4: v1(-2.886,32.7) R85.2@-2.2,32.7 ; U4.4@0.95,34.2 0.95,34.183 ccw(c1.458,34.183) 1.099,33.823 1.273,33.649 ccw(c1.633,34.008) 1.633,33.5 C31.2@2.1,33.5 ; R86.2@2.1,32.7 C31.2@2.1,33.5 ; v1(2.786,33.5) C31.2@2.1,33.5
  Top Layer w0.5: R77.1@-23.4,76.15 v2(-23.4,76.95) ; v2(-7,67.45) U9.3@-6.2,67.45 ; v1(-6.4,40.414) C37.2@-6.4,41.1
  Top Layer w0.8: C30.2@-21.4,66.45 -21.201,66.251 -12.662,66.251 L1.2@-12.46,66.05 ; L1.2@-13.271,66.45 cw(c-13.271,65.459) L1.2@-12.57,66.16
  Top Layer w1.4: C29.2@-24.6,66.45 C30.2@-21.4,66.45
  Bottom Layer w0.4: -2.886,33.5 v1(2.786,33.5) 2.786,30.151 ccw(c6.4,30.151) 3.844,27.596 v2(4.7,26.74)
  Bottom Layer w0.5: v2(-26.3,66.85) -23.4,66.85 ; -24.091,74.1 -24.091,71.944 ; v2@-23.382,76.926 ccw(c-22.319,75.508) -24.091,75.508 -24.091,71.944 ; v2(-7,67.45) cw(c-8.449,68.899) -8.449,66.85 -22.5,66.85 ; v1(-2.886,32.7) -2.886,33.5 -2.886,35.211 ccw(c-6.965,35.21) -4.081,38.095 v1(-6.4,40.414) -20.068,54.082 cw(c-12.022,62.127) -23.4,62.127 -23.4,66.85 ; v1(14.765,76) 0.1,76 cw(c0.1,77.69) -1.095,76.495 -2.146,77.546 ccw(c-3,76.693) -3.854,77.546 -4.946,76.454 cw(c-6.042,77.549) -6.042,76 -21.751,76 ccw(c-21.751,74.451) -23.3,74.451 -23.3,72.231 ccw(c-22.538,72.231) -23.077,71.692 -22.954,71.569 cw(c-24.049,70.474) -22.5,70.474 -22.5,66.85 ; -24.091,71.944 ccw(c-22.756,71.944) -23.7,71 cw(c-24.593,70.082) -23.312,70.082 -23.312,67.061 cw(c-23.612,67.061) -23.4,66.85 ; -23.4,66.85 -22.5,66.85
  other v2: -26.3,66.05
5V_ISOL: C36.2 U2.37 U2.40 U6.4 | length 19.8
  Top Layer w0.25: U2.37@3.47,8.5 4.559,8.5 ccw(c4.559,8.841) 4.8,8.6 4.836,8.636 cw(c5.231,8.241) 5.231,8.8 C36.2@6.4,8.8 v1(6.4,9.486) ccw(c5.586,9.486) 5.586,10.3 5.131,10.3 ccw(c5.131,9.741) 4.736,10.136 4.7,10.1 cw(c4.459,10.341) 4.459,10 U2.40@3.47,10
  Bottom Layer w0.5: v2(4.7,21.66) cw(c0.596,17.556) 6.4,17.556 v1(6.4,9.486)
B_SENS: D5.1 R99.2 SW1.1 SW1.2 U8.26 | length 26.9
  Top Layer w0.25: v1(-8.699,57.2) D5.1@-8.114,57.2
  Top Layer w0.3: D5.1@-8.114,57.2 U8.26@-6.15,57.2
  Top Layer w0.4: v1(-8.925,72.765) SW1.2@-8.925,74.025
  Top Layer w0.6: SW1.2@-8.925,74.025 SW1.1@-8.925,77.975 R99.2@-7.525,77.975
  Bottom Layer w0.25: v1(-8.925,72.765) -6.658,70.498 cw(c-8.941,68.216) -5.713,68.216 -5.713,67.427 cw(c-8.15,67.427) -6.427,65.704 -7.744,64.387 ccw(c-5.437,62.081) -8.699,62.081 v1(-8.699,57.2)
BSCL: R85.1 U3.33 U4.1 | length 15.2
  Top Layer w0.2: U3.33@-3.47,43.4 -2.139,43.4 cw(c-2.139,42.261) -1,42.261 -1,35.71 cw(c-1.508,35.71) -1.149,35.351 -1.407,35.093 ccw(c-1.048,34.734) -1.556,34.734 -1.556,31.748
  Top Layer w0.4: R85.1@-2.2,31.748 -1.556,31.748 -1.098,31.748 cw(c-1.098,31.6) U4.1@-0.95,31.6
BSDA: R86.1 U3.32 U4.3 | length 18.5
  Top Layer w0.2: U3.32@-3.47,43.9 -2.231,43.9 cw(c-2.231,42.269) -0.6,42.269 -0.6,38.21 ccw(c-0.092,38.21) -0.451,37.851 2.051,35.349 ccw(c2.41,35.708) 2.41,35.2 2.792,35.2 cw(c2.792,34.692) 3.3,34.692 3.3,32.256 cw(c2.792,32.256) 2.792,31.748 R86.1@2.1,31.748
  Top Layer w0.4: U4.3@0.95,31.6 cw(c1.098,31.6) 1.098,31.748 R86.1@2.1,31.748
CAN_H: D7.2 J9.1 U7.7 | length 7.2
  Top Layer w0.25: U7.7@19.1,76.825 22.114,76.825 ccw(c22.114,78.07) 22.995,77.19 D7.2@23.575,77.77
  Top Layer w0.5: D7.2@23.575,77.77 J9.1@25.95,77.77
CAN_L: D8.2 J9.2 U7.6 | length 7.2
  Top Layer w0.25: U7.6@19.1,76.175 22.1,76.175 ; 22.114,76.175 cw(c22.114,74.93) 22.995,75.81 D8.2@23.575,75.23
  Top Layer w0.5: D8.2@23.575,75.23 J9.2@25.95,75.23
CAN_RX: U7.4 U8.32 | length 33.7
  Top Layer w0.25: U8.32@-6.15,54.2 v1(-4.15,54.2) v1@-4.135,54.2 ; v1(14.765,75.175) 15.217,75.175 ccw(c15.217,75.858) 15.7,75.375 cw(c16.062,75.013) 16.062,75.525 U7.4@16.3,75.525
  Bottom Layer w0.25: v1(-4.15,54.2) 1.555,59.905 cw(c4.199,57.26) 4.199,61 5.014,61 ccw(c5.014,62.186) 6.2,62.186 6.2,65.065 cw(c9.905,65.065) 7.285,67.685 v1@14.77,75.17
CAN_TX: U7.1 U8.33 | length 37.3
  Top Layer w0.25: U8.33@-6.15,53.7 v1(-4.75,53.7) ; v1(14.765,77.825) 15.217,77.825 cw(c15.217,77.142) 15.7,77.625 ccw(c16.062,77.987) 16.062,77.475 U7.1@16.3,77.475
  Bottom Layer w0.25: v1(-4.75,53.7) -4.11,53.7 ccw(c-4.11,54.208) -3.751,53.849 2.129,59.729 cw(c4.232,57.626) 4.264,60.6 5.124,60.6 ccw(c5.124,62.131) 6.654,62.131 6.654,65.034 cw(c9.843,65.034) 7.588,67.288 15.151,74.851 ccw(c14.792,75.21) 15.3,75.21 15.3,77.08 ccw(c14.792,77.08) 15.151,77.439 v1(14.765,77.825)
CS: U3.41 U8.38 | length 17.3
  Top Layer w0.25: U8.38@-4.075,50.625 v1(-4.075,52.625) v1@-4.075,52.64 ; U3.41@-3.47,39.4 v1(-2.135,39.4)
  Bottom Layer w0.25: v1(-4.075,52.625) -4.075,42.505 ccw(c-1.262,42.505) -3.251,40.516 v1(-2.135,39.4)
EN_PWR: D5.2 R100.2 U1.3 U8.25 | length 39.2
  Top Layer w0.3: R100.2@-9,60.55 v1(-8.114,60.55) ; D5.2@-8.114,59.31 v1(-8.114,60.55) ; U8.25@-6.15,57.7 -6.15,59.202 ccw(c-7.498,59.202) -7.498,60.55 v1(-8.114,60.55)
  Top Layer w0.4: U1.3@-23.275,72.215 v1(-22.54,72.215)
  Bottom Layer w0.25: v1(-22.54,72.215) -22.54,74.126 cw(c-21.291,74.126) -21.291,75.375 -12.634,75.375 cw(c-12.634,70.888) -9.461,74.061 -6.293,70.893 cw(c-8.901,68.285) -5.213,68.285 -5.213,67.48 cw(c-8.335,67.48) -6.127,65.273 -7.365,64.035 ccw(c-5.554,62.225) -8.115,62.225 v1(-8.114,60.55)
GND: C1.1 C25.1 C29.1 C30.1 C31.1 C33.1 C35.1 C37.1 C39.1 C40.1 C41.1 C42.1 C44.1 C45.1 C46.1 C47.2 C48.1 C49.1 C50.1 C51.1 C52.1 C53.1 C54.1 D6.2 D7.1 D8.1 J6.2 J10.3 pad.*@25.95,60 pad.*@27.2,53.5 Q25.2 Q26.2 Q27.2 R24.2 R25.2 R75.1 R78.2 R91.1 R99.1 R103.1 R108.1 R109.1 U1.1 U1.9 U3.30 U3.31 U3.40 U4.2 U4.5 U5.8 U6.1 U7.2 U7.8 U7.9 U8.8 U8.23 U8.35 U8.44 U8.47 U9.1 | length 93.3
  Top Layer w0.25: v1(-8.285,52.95) C50.1@-7.7,52.95 -7.65,52.95 ccw(c-7.046,53.554) -7.046,52.7 U8.35@-6.15,52.7 ; J6.2@-7.2,44.9 C39.1@-5.6,44.9 U3.30@-3.47,44.9 U3.31@-3.47,44.4 ; v1(-6.8,38.686) -6.183,39.302 cw(c-5.465,38.584) -5.465,39.6 -5.231,39.6 ccw(c-5.231,40.159) -4.837,39.763 ; -4.836,39.764 -4.8,39.8 cw(c-4.559,39.559) -4.559,39.9 U3.40@-3.47,39.9 ; U8.23@-4.075,59.275 -4.075,60.171 cw(c-3.221,60.171) -3.825,60.775 C45.1@-3.825,60.825 v1(-3.825,61.41) ; U8.44@-1.075,50.625 v1(-1.075,52.025) ; v1(-0.41,49.075) C48.1@0.175,49.075 C48.1@0.225,49.075 ; C48.1@0.175,49.126 ccw(c-0.429,49.729) 0.425,49.729 U8.47@0.425,50.625 ; U8.8@2.5,55.7 C53.1@4.275,55.7 ; C46.1@15.3,77 ccw(c15.722,77.422) 15.722,76.825 U7.2@16.3,76.825 17.375,76.825 cw(c17.375,76.5) U7.9@17.7,76.5 ; U7.9@18.1,76.1 ccw(c17.7,76.1) U7.9@17.7,76.5 ; U7.8@19.1,77.475 18.368,77.475 ccw(c18.368,76.868) 17.761,76.868 17.761,76.561 cw(c17.7,76.561) U7.9@17.7,76.5
  Top Layer w0.35: C49.1@14,77 v1(14.765,77) C46.1@15.3,77
  Top Layer w0.4: Q27.2@-12.1,62.45 v1(-11.215,62.45) ; R91.1@-6.8,38 v1(-6.8,38.686) ; U9.1@-5.25,69.45 -5.25,70.64 cw(c-4.742,70.64) -5.101,70.999 C51.1@-4.8,71.3 -4.649,71.149 ccw(c-4.29,71.508) -4.29,71 -0.925,71 cw(c-0.925,70.492) -0.566,70.851 v1(-0.45,70.735) Q26.2@-0.45,70 ; v1(-4.825,63.065) -4.777,63.065 ccw(c-4.777,64.614) -3.681,63.519 R108.1@-3.4,63.8 C47.2@-2.1,63.8 C40.1@-0.5,63.8 ; U4.5@-0.95,34.2 0,34.2 ; U4.2@0,31.6 0,34.2 ; v1(2.786,34.5) C31.1@2.1,34.5 1.549,35.051 ccw(c1.19,34.692) 1.19,35.2 0.81,35.2 ccw(c0.81,34.692) 0.451,35.051 0.149,34.749 ccw(c0.508,34.39) 0,34.39 0,34.2 ; Q25.2@2.85,70 v1(2.85,70.735) ; C53.1@4.275,55.7 4.649,55.7 cw(c4.649,55.192) 5.008,55.551 v1(5.275,55.285) C52.1@5.275,54.7 C54.1@6.099,54.7 ; U5.8@7,64.425 C41.1@7,63.4 v1(7.735,63.4) ; C44.1@9.1,63 v1(9.835,63) ; C42.1@9.1,67.8 v1(9.835,67.8) ; R103.1@13.4,64.6 17.355,64.6 cw(c17.355,63.455) 18.5,63.455 18.5,60.2 R109.1@18.5,60
  Top Layer w0.5: v1(-8,40.414) C37.1@-8,41.1 C35.1@-8,42.4 C33.1@-8,43.6 ; C33.1@-7.98,43.62 ccw(c-8.375,44.016) -7.816,44.016 -7.816,44.053 cw(c-7.257,44.053) -7.652,44.448 J6.2@-7.2,44.9
  Top Layer w0.6: C25.1@14.1,54.3 R75.1@14.1,55.8 24.201,55.8 cw(c24.201,55.301) 24.7,55.301 R24.2@24.7,53.5 ; R75.1@14.4,55.8 14.4,58.7 15.9,60.2 18.5,60.2 R109.1@18.6,60.2 ; D8.1@20.625,75.23 v2(21.892,75.23) ; D7.1@20.625,77.77 v2(21.892,77.77)
  Top Layer w0.7: R78.2@-20.5,76.15 -20.5,72.95 ccw(c-20.4,72.95) v2(-20.4,72.85)
  other v1: -4.135,67.675 -2.965,77.25
  other v2: 4.7,29.28 -25,68.05 -24.2,68.05 -21.8,68.05 -21,68.05 -21.2,71.75 -20.4,71.75 -19.6,71.75 -21.2,72.85 -19.6,72.85 -21.2,73.95 -20.4,73.95 -19.6,73.95 -26.9,74.45 -26.1,74.45
MGND: C13.1 C32.1 C34.1 C36.1 C38.1 J5.2 pad.*@-27.2,2.9 Q13.2 R12.2 R38.1 R62.1 R90.1 U2.30 U2.31 U3.1 U6.3 | length 114.8
  Top Layer w0.2: U3.1@3.47,35.9 4.59,35.9 cw(c4.59,35.392) 4.949,35.751 5.951,34.749 cw(c5.592,34.39) 6.1,34.39 6.1,31.31 ccw(c6.608,31.31) 6.249,30.951 6.751,30.449 cw(c6.392,30.09) 6.9,30.09 6.9,27.01 ccw(c7.408,27.01) 7.049,26.651 7.551,26.149 cw(c7.192,25.79) 7.7,25.79 7.7,22.71 ccw(c8.208,22.71) 7.849,22.351 8.351,21.849 cw(c7.992,21.49) 8.5,21.49 8.5,18.41 ccw(c9.008,18.41) 8.649,18.051 9.151,17.549 cw(c8.792,17.19) 9.3,17.19 9.3,14.111 ccw(c9.808,14.111) 9.449,13.751 9.661,13.539 cw(c9.15,13.029) 9.872,13.029 9.872,6.3 ; C32.1@8,6.3 9.872,6.3 ; 9.872,0.6 9.872,6.3
  Top Layer w0.25: U2.31@3.47,5.5 U2.30@3.47,5 C38.1@5.6,5 J5.2@7.2,5
  Top Layer w0.5: U6.3@4.7,24.2 5.479,24.2 cw(c5.479,23.184) 6.198,23.902 6.702,23.398 cw(c5.984,22.679) 7,22.679 7,15.921 ccw(c8.016,15.921) 7.298,15.202 7.703,14.797 cw(c6.984,14.079) 8,14.079 8,11.9 ; R90.1@6.8,11.9 8,11.9 ; J5.2@7.2,5 7.652,5.452 ccw(c7.257,5.847) 7.816,5.847 7.816,5.884 cw(c8.375,5.884) C32.1@7.98,6.28 ; C32.1@8,6.3 C34.1@8,7.5 C36.1@8,8.8 8,11.9
  Top Layer w0.6: R12.2@-24.7,2.9 -24.7,1.099 ccw(c-24.201,1.099) -24.201,0.6 -14.1,0.6 ; R62.1@-12.8,2.1 C13.1@-14.1,2.1 -14.1,0.6 ; 10.8,0.6 R38.1@10.8,2.1 ; Q13.2@15.5,1.95 15.5,1.27 cw(c14.83,1.27) 14.83,0.6 9.872,0.6 -14.1,0.6
MISO: R88.2 U3.44 U8.40 | length 21
  Top Layer w0.25: U3.44@-3.47,37.9 v1(-1.635,37.9) ; R88.2@-3.075,49.075 v1(-3.075,52.625) v1@-3.075,52.64
  Bottom Layer w0.25: v1(-3.075,52.625) -3.075,42.821 ccw(c-1.033,42.821) -2.477,41.377 -1.431,40.331 cw(c-2.23,39.532) -1.1,39.532 -1.1,38.757 cw(c-1.877,38.757) -1.328,38.207 v1(-1.635,37.9)
MOSI: U3.43 U8.41 | length 19.9
  Top Layer w0.25: U3.43@-3.47,38.4 v1(-2.135,38.4) ; U8.41@-2.575,50.625 v1(-2.575,52.025)
  Bottom Layer w0.25: v1(-2.575,52.025) -2.575,42.932 ccw(c-0.988,42.932) -2.11,41.81 -1.135,40.835 cw(c-2.426,39.544) -0.6,39.544 -0.6,38.466 cw(c-1.701,38.466) -0.923,37.687 cw(c-1.623,38.387) -1.623,37.396 cw(c-1.623,37.908) -2.135,37.908 v1(-2.135,38.4)
NetC2_1: C2.1 C3.2 R27.2 U2.4 | length 48.9
  Top Layer w0.2: -14.1,51.2 -13.21,51.2 cw(c-13.21,50.692) -12.851,51.051 -12.249,50.449 cw(c-12.608,50.09) -12.1,50.09 -12.1,47.11 ccw(c-11.592,47.11) -11.951,46.751 -11.449,46.249 cw(c-11.808,45.89) -11.3,45.89 -11.3,42.91 ccw(c-10.792,42.91) -11.151,42.551 -10.649,42.049 cw(c-11.008,41.69) -10.5,41.69 -10.5,38.71 ccw(c-9.992,38.71) -10.351,38.351 -9.849,37.849 cw(c-10.208,37.49) -9.7,37.49 -9.7,34.51 ccw(c-9.192,34.51) -9.551,34.151 -9.049,33.649 cw(c-9.408,33.29) -8.9,33.29 -8.9,30.11 ccw(c-8.392,30.11) -8.751,29.751 -8.249,29.249 cw(c-8.608,28.89) -8.1,28.89 -8.1,25.81 ccw(c-7.592,25.81) -7.951,25.451 -7.449,24.949 cw(c-7.808,24.59) -7.3,24.59 -7.3,21.51 ccw(c-6.792,21.51) -7.151,21.151 -6.649,20.649 cw(c-7.008,20.29) -6.5,20.29 -6.5,17.211 ccw(c-5.992,17.21) -6.351,16.851 -5.849,16.349 cw(c-6.208,15.99) -5.7,15.99 -5.7,13.292 ccw(c-4.908,13.292) -4.908,12.5 U2.4@-3.47,12.5
  Top Layer w0.6: R27.2@-15.7,51.2 -14.1,51.2 ; C3.2@-14.1,49.7 -14.1,51.2 ; C2.1@-14.1,52.7 -14.1,51.2
NetC2_2: C2.2 R26.2 U2.2 | length 49.2
  Top Layer w0.2: R26.2@-14.1,55.8 -13.141,55.8 cw(c-13.141,54.759) -12.1,54.759 -12.1,51.71 ccw(c-11.592,51.71) -11.951,51.351 -11.449,50.849 cw(c-11.808,50.49) -11.3,50.49 -11.3,47.51 ccw(c-10.792,47.51) -11.151,47.151 -10.649,46.649 cw(c-11.008,46.29) -10.5,46.29 -10.5,43.31 ccw(c-9.992,43.31) -10.351,42.951 -9.849,42.449 cw(c-10.208,42.09) -9.7,42.09 -9.7,39.11 ccw(c-9.192,39.11) -9.551,38.751 -9.049,38.249 cw(c-9.408,37.89) -8.9,37.89 -8.9,34.71 ccw(c-8.392,34.71) -8.751,34.351 -8.249,33.849 cw(c-8.608,33.49) -8.1,33.49 -8.1,30.41 ccw(c-7.592,30.41) -7.951,30.051 -7.449,29.549 cw(c-7.808,29.19) -7.3,29.19 -7.3,26.11 ccw(c-6.792,26.11) -7.151,25.751 -6.649,25.249 cw(c-7.008,24.89) -6.5,24.89 -6.5,21.81 ccw(c-5.992,21.81) -6.351,21.451 -5.849,20.949 cw(c-6.208,20.59) -5.7,20.59 -5.7,17.611 ccw(c-5.192,17.61) -5.551,17.251 -5.049,16.749 cw(c-5.408,16.39) -4.9,16.39 -4.9,13.905 ccw(c-4.495,13.905) -4.495,13.5 U2.2@-3.47,13.5 ; U2.2@-3,13.5 U2.2@-2.97,13.5
  Top Layer w0.6: C2.2@-14.1,54.3 R26.2@-14.1,55.8
NetC3_1: C3.1 C4.2 R28.2 U2.6 | length 45.6
  Top Layer w0.2: -14.1,46.6 -13.21,46.6 cw(c-13.21,46.092) -12.851,46.451 -12.249,45.849 cw(c-12.608,45.49) -12.1,45.49 -12.1,42.51 ccw(c-11.592,42.51) -11.951,42.151 -11.449,41.649 cw(c-11.808,41.29) -11.3,41.29 -11.3,38.31 ccw(c-10.792,38.31) -11.151,37.951 -10.649,37.449 cw(c-11.008,37.09) -10.5,37.09 -10.5,34.11 ccw(c-9.992,34.11) -10.351,33.751 -9.849,33.249 cw(c-10.208,32.89) -9.7,32.89 -9.7,29.91 ccw(c-9.192,29.91) -9.551,29.551 -9.049,29.049 cw(c-9.408,28.69) -8.9,28.69 -8.9,25.51 ccw(c-8.392,25.51) -8.751,25.151 -8.249,24.649 cw(c-8.608,24.29) -8.1,24.29 -8.1,21.21 ccw(c-7.592,21.21) -7.951,20.851 -7.449,20.349 cw(c-7.808,19.99) -7.3,19.99 -7.3,16.911 ccw(c-6.792,16.91) -7.151,16.551 -6.649,16.049 cw(c-7.008,15.69) -6.5,15.69 -6.5,12.611 ccw(c-5.992,12.61) -6.351,12.251 -5.749,11.649 ccw(c-5.39,12.008) -5.39,11.5 U2.6@-3.47,11.5
  Top Layer w0.6: R28.2@-15.7,46.6 -14.1,46.6 ; C4.2@-14.1,45.1 -14.1,46.6 ; C3.1@-14.1,48.1 -14.1,46.6
NetC4_1: C4.1 C5.2 R29.2 U2.8 | length 42.1
  Top Layer w0.2: -14.1,42 -13.21,42 cw(c-13.21,41.492) -12.851,41.851 -12.249,41.249 cw(c-12.608,40.89) -12.1,40.89 -12.1,37.91 ccw(c-11.592,37.91) -11.951,37.551 -11.449,37.049 cw(c-11.808,36.69) -11.3,36.69 -11.3,33.71 ccw(c-10.792,33.71) -11.151,33.351 -10.649,32.849 cw(c-11.008,32.49) -10.5,32.49 -10.5,29.51 ccw(c-9.992,29.51) -10.351,29.151 -9.849,28.649 cw(c-10.208,28.29) -9.7,28.29 -9.7,25.31 ccw(c-9.192,25.31) -9.551,24.951 -9.049,24.449 cw(c-9.408,24.09) -8.9,24.09 -8.9,20.91 ccw(c-8.392,20.91) -8.751,20.551 -8.249,20.049 cw(c-8.608,19.69) -8.1,19.69 -8.1,16.611 ccw(c-7.592,16.61) -7.951,16.251 -7.449,15.749 cw(c-7.808,15.39) -7.3,15.39 -7.3,12.311 ccw(c-6.792,12.31) -7.151,11.951 -5.849,10.649 ccw(c-5.49,11.008) -5.49,10.5 U2.8@-3.47,10.5
  Top Layer w0.6: R29.2@-15.7,42 -14.1,42 ; C5.2@-14.1,40.5 -14.1,42 ; C4.1@-14.1,43.5 -14.1,42
NetC5_1: C5.1 C6.2 R30.2 U2.10 | length 38.6
  Top Layer w0.2: -14.1,37.4 -13.21,37.4 cw(c-13.21,36.892) -12.851,37.251 -12.249,36.649 cw(c-12.608,36.29) -12.1,36.29 -12.1,33.31 ccw(c-11.592,33.31) -11.951,32.951 -11.449,32.449 cw(c-11.808,32.09) -11.3,32.09 -11.3,29.11 ccw(c-10.792,29.11) -11.151,28.751 -10.649,28.249 cw(c-11.008,27.89) -10.5,27.89 -10.5,24.91 ccw(c-9.992,24.91) -10.351,24.551 -9.849,24.049 cw(c-10.208,23.69) -9.7,23.69 -9.7,20.71 ccw(c-9.192,20.71) -9.551,20.351 -9.049,19.849 cw(c-9.408,19.49) -8.9,19.49 -8.9,16.311 ccw(c-8.392,16.31) -8.751,15.951 -8.249,15.449 cw(c-8.608,15.09) -8.1,15.09 -8.1,12.011 ccw(c-7.592,12.01) -7.951,11.651 -5.949,9.649 ccw(c-5.59,10.008) -5.59,9.5 U2.10@-3.47,9.5
  Top Layer w0.6: R30.2@-15.7,37.4 -14.1,37.4 ; C6.2@-14.1,35.9 -14.1,37.4 ; C5.1@-14.1,38.9 -14.1,37.4
NetC6_1: C6.1 C7.2 R31.2 U2.12 | length 35.1
  Top Layer w0.2: -14.1,32.8 -13.21,32.8 cw(c-13.21,32.292) -12.851,32.651 -12.249,32.049 cw(c-12.608,31.69) -12.1,31.69 -12.1,28.71 ccw(c-11.592,28.71) -11.951,28.351 -11.449,27.849 cw(c-11.808,27.49) -11.3,27.49 -11.3,24.51 ccw(c-10.792,24.51) -11.151,24.151 -10.649,23.649 cw(c-11.008,23.29) -10.5,23.29 -10.5,20.31 ccw(c-9.992,20.31) -10.351,19.951 -9.849,19.449 cw(c-10.208,19.09) -9.7,19.09 -9.7,16.11 ccw(c-9.192,16.11) -9.551,15.751 -9.049,15.249 cw(c-9.408,14.89) -8.9,14.89 -8.9,11.71 ccw(c-8.392,11.71) -8.751,11.351 -6.049,8.649 ccw(c-5.69,9.008) -5.69,8.5 U2.12@-3.47,8.5
  Top Layer w0.6: R31.2@-15.7,32.8 -14.1,32.8 ; C7.2@-14.1,31.3 -14.1,32.8 ; C6.1@-14.1,34.3 -14.1,32.8
NetC7_1: C7.1 C8.2 R32.2 U2.14 | length 31.6
  Top Layer w0.2: -14.1,28.2 -13.21,28.2 cw(c-13.21,27.692) -12.851,28.051 -12.249,27.449 cw(c-12.608,27.09) -12.1,27.09 -12.1,24.11 ccw(c-11.592,24.11) -11.951,23.751 -11.449,23.249 cw(c-11.808,22.89) -11.3,22.89 -11.3,19.91 ccw(c-10.792,19.91) -11.151,19.551 -10.649,19.049 cw(c-11.008,18.69) -10.5,18.69 -10.5,15.71 ccw(c-9.992,15.71) -10.351,15.351 -9.849,14.849 cw(c-10.208,14.49) -9.7,14.49 -9.7,11.51 ccw(c-9.192,11.51) -9.551,11.151 -6.049,7.649 ccw(c-5.69,8.008) -5.69,7.5 U2.14@-3.47,7.5
  Top Layer w0.6: R32.2@-15.7,28.2 -14.1,28.2 ; C8.2@-14.1,26.7 -14.1,28.2 ; C7.1@-14.1,29.7 -14.1,28.2
NetC8_1: C8.1 C9.2 R33.2 U2.16 | length 28.1
  Top Layer w0.2: -14.1,23.6 -13.21,23.6 cw(c-13.21,23.092) -12.851,23.451 -12.249,22.849 cw(c-12.608,22.49) -12.1,22.49 -12.1,19.51 ccw(c-11.592,19.51) -11.951,19.151 -11.449,18.649 cw(c-11.808,18.29) -11.3,18.29 -11.3,15.31 ccw(c-10.792,15.31) -11.151,14.951 -10.649,14.449 cw(c-11.008,14.09) -10.5,14.09 -10.5,11.11 ccw(c-9.992,11.11) -10.351,10.751 -6.249,6.649 ccw(c-5.89,7.008) -5.89,6.5 U2.16@-3.47,6.5
  Top Layer w0.6: R33.2@-15.7,23.6 -14.1,23.6 ; C9.2@-14.1,22.1 -14.1,23.6 ; C8.1@-14.1,25.1 -14.1,23.6
NetC9_1: C9.1 C10.2 R34.2 U2.18 | length 24.7
  Top Layer w0.2: -14.1,19 -13.21,19 cw(c-13.21,18.492) -12.851,18.851 -12.249,18.249 cw(c-12.608,17.89) -12.1,17.89 -12.1,14.91 ccw(c-11.592,14.91) -11.951,14.551 -11.449,14.049 cw(c-11.808,13.69) -11.3,13.69 -11.3,10.71 ccw(c-10.792,10.71) -11.151,10.351 -6.449,5.649 ccw(c-6.09,6.008) -6.09,5.5 U2.18@-3.47,5.5
  Top Layer w0.6: R34.2@-15.7,19 -14.1,19 ; C10.2@-14.1,17.5 -14.1,19 ; C9.1@-14.1,20.5 -14.1,19
NetC10_1: C10.1 C11.2 R35.2 U2.20 | length 21.2
  Top Layer w0.2: -14.1,14.4 -13.21,14.4 cw(c-13.21,13.892) -12.851,14.251 -12.249,13.649 cw(c-12.608,13.29) -12.1,13.29 -12.1,10.31 ccw(c-11.592,10.31) -11.951,9.951 -6.649,4.649 ccw(c-6.29,5.008) -6.29,4.5 U2.20@-3.47,4.5
  Top Layer w0.6: R35.2@-15.7,14.4 -14.1,14.4 ; C11.2@-14.1,12.9 -14.1,14.4 ; C10.1@-14.1,15.9 -14.1,14.4
NetC11_1: C11.1 C12.2 R36.2 U2.22 | length 17.8
  Top Layer w0.2: -14.1,9.8 -13.21,9.8 cw(c-13.21,9.292) -12.851,9.651 -6.849,3.649 ccw(c-6.49,4.008) -6.49,3.5 U2.22@-3.47,3.5
  Top Layer w0.6: R36.2@-15.7,9.8 -14.1,9.8 ; C12.2@-14.1,8.3 -14.1,9.8 ; C11.1@-14.1,11.3 -14.1,9.8
NetC12_1: C12.1 C13.2 R37.2 U2.24 | length 16.3
  Top Layer w0.2: -14.1,5.25 -9.86,5.25 cw(c-9.86,4.742) -9.501,5.101 -7.049,2.649 ccw(c-6.69,3.008) -6.69,2.5 U2.24@-3.47,2.5
  Top Layer w0.6: R37.2@-15.7,5.2 -14.1,5.2 ; C13.2@-14.1,3.7 -14.1,5.2 ; C12.1@-14.1,6.7 -14.1,5.2
NetC14_1: C14.1 C15.2 R39.2 U3.4 | length 42.4
  Top Layer w0.2: U3.4@3.47,37.4 4.79,37.4 cw(c4.79,36.892) 5.149,37.251 7.151,35.249 cw(c6.792,34.89) 7.3,34.89 7.3,31.81 ccw(c7.808,31.81) 7.449,31.451 7.951,30.949 cw(c7.592,30.59) 8.1,30.59 8.1,27.51 ccw(c8.608,27.51) 8.249,27.151 8.751,26.649 cw(c8.392,26.29) 8.9,26.29 8.9,23.11 ccw(c9.408,23.11) 9.049,22.751 9.551,22.249 cw(c9.192,21.89) 9.7,21.89 ; 9.7,21.89 9.7,18.91 ccw(c10.208,18.91) 9.849,18.551 10.351,18.049 cw(c9.992,17.69) 10.5,17.69 10.5,14.71 ccw(c11.008,14.71) 10.649,14.351 11.151,13.849 cw(c10.792,13.49) 11.3,13.49 11.3,10.51 ccw(c11.808,10.51) 11.449,10.151 11.951,9.649 cw(c11.592,9.29) 12.1,9.29 12.1,6.31 ccw(c12.608,6.31) 12.249,5.951 12.851,5.349 ccw(c13.21,5.708) 13.21,5.2 14.1,5.2
  Top Layer w0.6: C14.1@14.1,3.7 14.1,5.2 ; C15.2@14.1,6.7 14.1,5.2 ; R39.2@15.7,5.2 14.1,5.2
NetC14_2: C14.2 R38.2 U3.2 | length 42.3
  Top Layer w0.2: U3.2@3.47,36.4 4.69,36.4 cw(c4.69,35.892) 5.049,36.251 6.351,34.949 cw(c5.992,34.59) 6.5,34.59 6.5,31.51 ccw(c7.008,31.51) 6.649,31.151 7.151,30.649 cw(c6.792,30.29) 7.3,30.29 7.3,27.21 ccw(c7.808,27.21) 7.449,26.851 7.951,26.349 cw(c7.592,25.99) 8.1,25.99 8.1,22.91 ccw(c8.608,22.91) 8.249,22.551 8.751,22.049 cw(c8.392,21.69) 8.9,21.69 8.9,18.51 ccw(c9.408,18.51) 9.049,18.151 9.551,17.649 cw(c9.192,17.29) 9.7,17.29 ; 9.7,17.29 9.7,14.31 ccw(c10.208,14.31) 9.849,13.951 10.351,13.449 cw(c9.992,13.09) 10.5,13.09 10.5,4.424 ccw(c11.524,4.424) R38.2@10.8,3.7 11.319,3.7 cw(c11.319,3.219) 11.8,3.219 11.8,1.682 ccw(c12.182,1.682) 12.182,1.3 13.795,1.3 ccw(c13.795,1.605) 14.1,1.605 C14.2@14.1,2.1
NetC15_1: C15.1 C16.2 R40.2 U3.6 | length 38.9
  Top Layer w0.2: U3.6@3.47,38.4 4.89,38.4 cw(c4.89,37.892) 5.249,38.251 7.951,35.549 cw(c7.592,35.19) 8.1,35.19 8.1,32.11 ccw(c8.608,32.11) 8.249,31.751 8.751,31.249 cw(c8.392,30.89) 8.9,30.89 8.9,27.71 ccw(c9.408,27.71) 9.049,27.351 9.551,26.849 cw(c9.192,26.49) 9.7,26.49 ; 9.7,26.49 9.7,23.51 ccw(c10.208,23.51) 9.849,23.151 10.351,22.649 cw(c9.992,22.29) 10.5,22.29 10.5,19.31 ccw(c11.008,19.31) 10.649,18.951 11.151,18.449 cw(c10.792,18.09) 11.3,18.09 11.3,15.11 ccw(c11.808,15.11) 11.449,14.751 11.951,14.249 cw(c11.592,13.89) 12.1,13.89 12.1,10.91 ccw(c12.608,10.91) 12.249,10.551 12.851,9.949 ccw(c13.21,10.308) 13.21,9.8 14.1,9.8
  Top Layer w0.6: C15.1@14.1,8.3 14.1,9.8 ; C16.2@14.1,11.3 14.1,9.8 ; R40.2@15.7,9.8 14.1,9.8